# Altium PCB PCB3小.PcbDoc
Units mil, origin at the board's own origin, x right, y up, seen from the top; angles counter-clockwise.
Board outline 7278.39 x 4778.39 mil, 2 copper layers (Top Layer, Bottom Layer), stack 16 mil thick; 124 components, 58 nets, 360 pads, 620 vias.
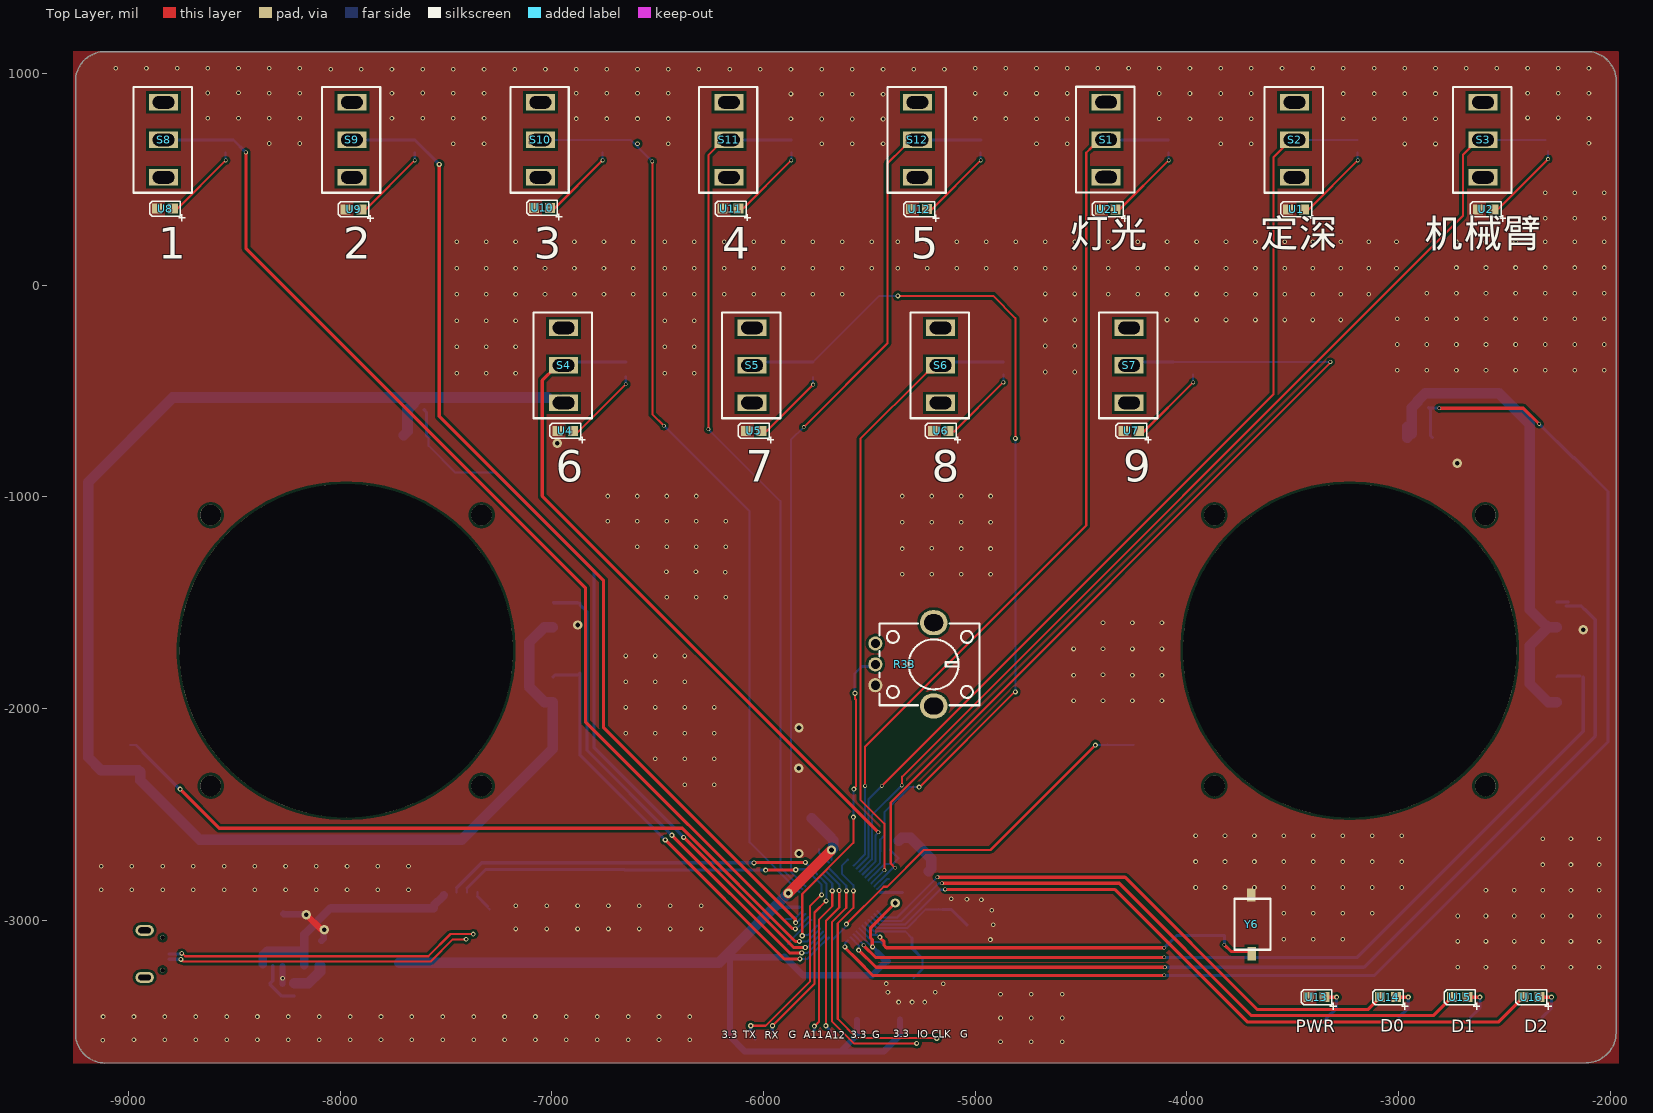
[diagram p0: Top Layer view]
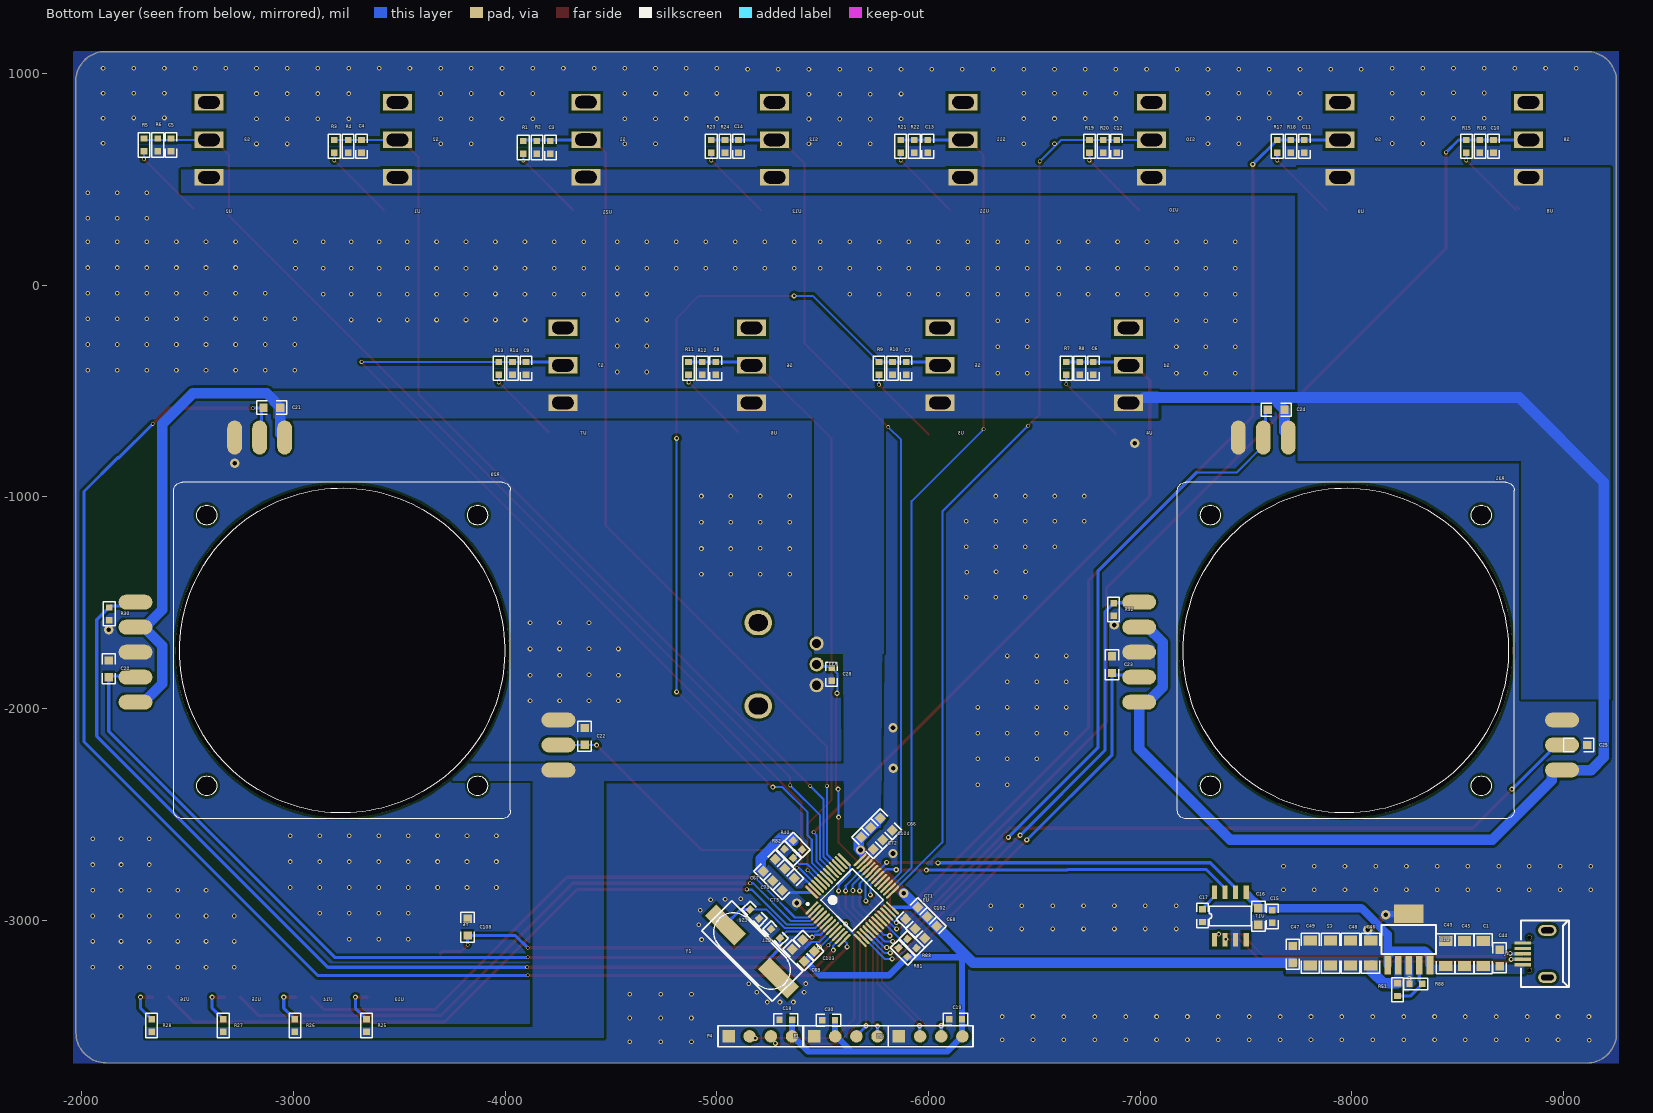
[diagram p1: Bottom Layer view, seen from below]

## Layer stack, top to bottom
Top Solder: solder mask 0.6, Solder Resist, Dk 3.5
Top Layer: signal copper 1.6
Dielectric 1: dielectric 12.8, FR-4, Dk 4.8
Bottom Layer: signal copper 1.6
Bottom Solder: solder mask 0.6, Solder Resist, Dk 3.5

## Board outline
-9250,-3535 ccw(c-9110.81,-3535) -9110.81,-3674.19 -2110.81,-3672.42 -2112.23,-3672.43 ccw(c-2112.23,-3532.13) -1971.92,-3532.13 -1971.61,967.87 -1971.61,966.17 ccw(c-2109.64,966.17) -2109.64,1104.19 -2110.81,1104.19 -9110.81,1104.19 ccw(c-9110.81,965) -9250,965

## Design rules (kind name [scope] priority, off if disabled: settings)
Clearance [All] p1: gap=6 ignorepadtopadclearanceinfootprint=TRUE except(0: Arc-Hole Track-Hole SMDPad-Hole THPad-Hole Via-Hole Fill-Hole Poly-Hole Region-Hole Text-Hole; 12: Arc-Fill Arc-Poly Arc-Region Track-Fill Track-Poly Track-Region SMDPad-Fill SMDPad-Poly SMDPad-Region THPad-Fill THPad-Poly THPad-Region Via-Fill Via-Poly Via-Region Fill-Fill Fill-Poly Fill-Region Poly-Poly Poly-Region Region-Region)
PlaneConnect [All] p1: planeconnectstyle=Direct reliefexpansion=20 reliefentries=4 reliefconductorwidth=10 reliefairgap=10
PolygonConnect [All] p1: connectstyle=Direct reliefconductorwidth=10 reliefentries=4 polygonreliefangle="90 Angle" airgapwidth=10
RoutingVias [All] p1: holewidth=28 width=50 viastyle="Through Hole" minholewidth=28 minwidth=50 maxholewidth=28 maxwidth=50
SolderMaskExpansion [All] p1: expansion=4 istentingtop=FALSE
Width pwr [InNetClass('pwr')] p1: maxlimit=60 minlimit=15 preferedwidth=15
Width [InNetClass('SIGNAL')] p2: maxlimit=15 minlimit=10 preferedwidth=15 minimp=50.000000 maximp=50.000000 favimp=50.000000
29 further rules are at their usual default settings.

## Classes and differential pairs
net class PWR: +5V VCC_3.3V
net class SIGNAL: ADC1 ADC2 ADC3 ADC4 ADC5 ADC6 ADC7 ADC8 ADC9 BOOT0 BOOT1 CH330_D+ CH330_D- LED0 LED1 LED2 NetC17_1 NetR1_1 NetR3_1 NetR5_1 NetR7_1 NetR9_1 NetR11_1 NetR13_1 NetR15_1 NetR17_1 NetR19_1 NetR21_1 NetR23_1 NetR25_2 NetR26_2 NetR27_2 NetR28_2 NetR51_2 NRST OSCIN OSCOUT PA11 PA12 PB3 PB4 PB5 PB6 PB7 PB8 PB9 PB10 PB11 PB12 PB13 PB14 SWCLK SWIO U1_RX U1_TX
net class GND: AGND

## Components (designator, comment, footprint, x,y, rotation, side; value= is the part's Value field where it differs from the comment)
C1 "CAP-CFR04R-C" 1206C -8607.56,-3153.88 r0 top value=10uf
C2 "CAP-CFR04R-C" 1206C -7885.47,-3151.12 r0 top value=10uf
C3 "CAP-CFR04R-C" 0603C -4215.53,649.66 r270 top value=104
C4 "CAP-CFR04R-C" 0603C -3323.38,654.66 r270 top value=104
C5 "CAP-CFR04R-C" 0603C -2423.64,661.35 r270 top value=104
C6 "CAP-CFR04R-C" 0603C -6780.97,-394.03 r270 top value=104
C7 "CAP-CFR04R-C" 0603C -5896.19,-394.03 r270 top value=104
C8 "CAP-CFR04R-C" 0603C -4996.77,-394.03 r270 top value=104
C9 "CAP-CFR04R-C" 0603C -4100.53,-394.03 r270 top value=104
C10 "CAP-CFR04R-C" 0603C -8671.24,654.66 r270 top value=104
C11 "CAP-CFR04R-C" 0603C -7777.86,654.66 r270 top value=104
C12 "CAP-CFR04R-C" 0603C -6890.71,654.66 r270 top value=104
C13 "CAP-CFR04R-C" 0603C -5998.6,654.66 r270 top value=104
C14 "CAP-CFR04R-C" 0603C -5104.23,654.66 r270 top value=104
C15 "CAP-CFR04R-C" 0603C -7621.2,-2979.88 r90 top value=104
C16 "CAP-CFR04R-C" 0805C -7551.2,-2974.88 r90 top value=104
C17 "CAP-CFR04R-C" 0603C -7296.2,-2979.88 r270 top value=104
C18 "CAP-CFR04R-C" 0603C -5327.58,-3467.3 r180 top value=22pf
C19 "CAP-CFR04R-C" 0603C -6130,-3465 r180 top value=22pf
C20 "CAP-CFR04R-C" 0805C -2120,-1805 r90 top value=104
C21 "CAP-CFR04R-C" 0805C -2890,-585.12 r0 top value=104
C22 "CAP-CFR04R-C" 0805C -4367.96,-2123.52 r90 top value=104
C23 "CAP-CFR04R-C" 0805C -6860,-1785 r90 top value=104
C24 "CAP-CFR04R-C" 0805C -7635,-595.12 r0 top value=104
C25 "CAP-CFR04R-C" 0805C -9080,-2165 r180 top value=104
C26 "CAP-CFR04R-C" 0603C -5175,-2969.86 r45 top value=22pf
C27 "CAP-CFR04R-C" 0603C -5280,-3063.08 r225 top value=22pf
C28 "CAP-CFR04R-C" 0603C -5544.53,-1839.98 r270 top value=104
C30 "CAP-CFR04R-C" 0603C -5530,-3469.6 r180 top value=22pf
C43 "CAP-CFR04R-C" 1206C -8429.53,-3153.88 r0 top value=10uf
C44 "CAP-CFR04R-C" 0805C -8705,-3185 r270 top value=1uf
C45 "CAP-CFR04R-C" 1206C -8518.55,-3153.88 r0 top value=10uf
C46 "CAP-CFR04R-C" 1206C -8075.47,-3151.12 r0 top value=10uf
C47 "CAP-CFR04R-C" 0805C -7727.51,-3167.6 r270 top value=1uf
C48 "CAP-CFR04R-C" 1206C -7980.47,-3151.12 r0 top value=10uf
C49 "CAP-CFR04R-C" 1206C -7790.47,-3151.12 r0 top value=10uf
C66 "CAP-CFR04R-C" 0805C -5810.47,-2546.12 r225 top value=104
C67 "CAP-CFR04R-C" 0805C -5247.29,-2729.83 r135 top value=104
C68 "CAP-CFR04R-C" 0805C -6010.47,-3066.12 r315 top value=104
C69 "CAP-CFR04R-C" 0805C -5374.65,-3165.23 r45 top value=104
C70 "CAP-CFR04R-C" 0805C -5292.29,-2774.83 r135 top value=104
C71 "CAP-CFR04R-C" 0805C -5920.47,-2976.12 r315 top value=104
C72 "CAP-CFR04R-C" 0805C -5720.47,-2636.12 r225 top value=104
C73 "CAP-CFR04R-C" 0805C -5337.29,-2819.83 r135 top value=104
C102 "CAP-CFR04R-C" 0805C -5965.47,-3021.12 r315 top value=104
C103 "CAP-CFR04R-C" 0805C -5422.59,-3118.71 r45 top value=104
C104 "CAP-CFR04R-C" 0805C -5765.47,-2591.12 r225 top value=104
C108 "CAP-CFR04R-C" 0805C -3815.47,-3025.52 r90 top value=104
J1 "MICRO_USB" MICRO_USB -8910.47,-3156.12 r0 bottom
P1 "HDR1X4" HDR1X4(2) -5600,-3555 r180 bottom
P2 "HDR1X4" HDR1X4(2) -6001,-3555 r180 bottom
P4 "HDR1X4" HDR1X4(2) -5196,-3555 r180 bottom
R1 "RES-WR1" 0603R -4095.53,648.77 r270 top value=2K
R2 "RES-WR1" 0603R -4160.27,648.77 r270 top value=20K
R3 "RES-WR1" 0603R -3203.1,653.77 r270 top value=2K
R4 "RES-WR1" 0603R -3268.25,653.77 r270 top value=20K
R5 "RES-WR1" 0603R -2303.64,660.46 r270 top value=2K
R6 "RES-WR1" 0603R -2368.64,660.46 r270 top value=20K
R7 "RES-WR1" 0603R -6660.97,-394.92 r270 top value=2K
R8 "RES-WR1" 0603R -6725.07,-394.92 r270 top value=20K
R9 "RES-WR1" 0603R -5776.19,-394.92 r270 top value=2K
R10 "RES-WR1" 0603R -5840.5,-394.92 r270 top value=20K
R11 "RES-WR1" 0603R -4876.77,-394.92 r270 top value=2K
R12 "RES-WR1" 0603R -4941.3,-394.92 r270 top value=20K
R13 "RES-WR1" 0603R -3980.53,-394.92 r270 top value=2K
R14 "RES-WR1" 0603R -4045.27,-394.92 r270 top value=20K
R15 "RES-WR1" 0603R -8551.24,653.77 r270 top value=2K
R16 "RES-WR1" 0603R -8615.34,653.77 r270 top value=20K
R17 "RES-WR1" 0603R -7657.86,653.77 r270 top value=2K
R18 "RES-WR1" 0603R -7722.09,653.77 r270 top value=20K
R19 "RES-WR1" 0603R -6770.71,653.77 r270 top value=2K
R20 "RES-WR1" 0603R -6835.5,653.77 r270 top value=20K
R21 "RES-WR1" 0603R -5878.6,653.77 r270 top value=2K
R22 "RES-WR1" 0603R -5943.08,653.77 r270 top value=20K
R23 "RES-WR1" 0603R -4984.23,653.77 r270 top value=2K
R24 "RES-WR1" 0603R -5048.85,653.77 r270 top value=20K
R25 "RES-WR1" 0603R -3355,-3500 r270 top value=510R
R26 "RES-WR1" 0603R -3016.67,-3500 r270 top value=510R
R27 "RES-WR1" 0603R -2678.33,-3500 r270 top value=510R
R28 "RES-WR1" 0603R -2340,-3500 r270 top value=510R
R29 "ROCKER" ROCKER#1 -3230,-1726.6 r0 top
R30 "RES-WR1" 0603R -2140,-1555 r270 top value=2K
R31 "ROCKER" ROCKER#2 -7971.75,-1726.6 r0 top
R32 "RES-WR1" 0603R -6885,-1535 r270 top value=2K
R33 "RK09K" RK09K_RES -5209.53,-1798.84 r270 top
R40 "RES-WR1" 0603R -5391.29,-2639.83 r225 top value=???
R51 "RES-WR1" 0603R -8205,-3325 r90 top value=52.3K
R81 "RES-WR1" 0603R -5870,-3156.34 r45 top value=???
R82 "RES-WR1" 0603R -5329.98,-2690.68 r45 top value=???
R83 "RES-WR1" 0603R -5930.47,-3104.09 r225 top value=???
R88 "RES-WR1" 0603R -8305,-3290 r180 top value=510R
S1 "TOGGLE_SW" TOGGLE_SWITCH -4358.96,683.38 r0 top
S2 "TOGGLE_SW" TOGGLE_SWITCH -3468.96,682.84 r0 top
S3 "TOGGLE_SW" TOGGLE_SWITCH -2578.3,682.84 r0 top
S4 "TOGGLE_SW" TOGGLE_SWITCH -6922.23,-382.82 r0 top
S5 "TOGGLE_SW" TOGGLE_SWITCH -6031.58,-382.82 r0 top
S6 "TOGGLE_SW" TOGGLE_SWITCH -5140.92,-382.82 r0 top
S7 "TOGGLE_SW" TOGGLE_SWITCH -4250.27,-382.82 r0 top
S8 "TOGGLE_SW" TOGGLE_SWITCH -8812.23,682.84 r0 top
S9 "TOGGLE_SW" TOGGLE_SWITCH -7922.23,682.84 r0 top
S10 "TOGGLE_SW" TOGGLE_SWITCH -7031.58,682.84 r0 top
S11 "TOGGLE_SW" TOGGLE_SWITCH -6140.92,682.84 r0 top
S12 "TOGGLE_SW" TOGGLE_SWITCH -5250.27,682.84 r0 top
U1 "DS0" 0805D -3491.07,361.82 r0 top
U2 "DS0" 0805D -2595.2,361.82 r0 top
U3 "STM32F103C" LQFP-48_M -5630.47,-2921.12 r135 top
U4 "DS0" 0805D -6944.35,-684.4 r0 top
U5 "DS0" 0805D -6053.69,-684.4 r0 top
U6 "DS0" 0805D -5170.31,-684.4 r0 top
U7 "DS0" 0805D -4270,-684.4 r0 top
U8 "DS0" 0805D -8835,365 r0 top
U9 "DS0" 0805D -7944.35,361.87 r0 top
U10 "DS0" 0805D -7053.69,368.93 r0 top
U11 "DS0" 0805D -6163.04,365.8 r0 top
U12 "DS0" 0805D -5272.38,362.66 r0 top
U13 "DS0" 0805D -3395.2,-3360 r0 top
U14 "DS0" 0805D -3056.8,-3360 r0 top
U15 "DS0" 0805D -2718.4,-3360 r0 top
U16 "DS0" 0805D -2380,-3360 r0 top
U17 "CH340" SOP_8 -7425.47,-2979.88 r90 top
U18 "TPS737" SOT-223-6_L6.5-W3.5-P1.27-BL -8260.47,-3121.12 r270 top
U21 "DS0" 0805D -4381.07,361.82 r0 top
Y1 "XTAL" XTAL3 -5165.14,-3146.6 r225 bottom
Y6 "KEY" KEY_3_6_2.5 -3705.47,-2990.52 r0 top

## Footprints (in the part's own frame and the unit in brackets; to place one, negate y for a bottom-side part, rotate by r counter-clockwise, add the part's x,y. Pads: shape width x height; smd on the part's side, far side on the other; paste and mask are expansions set on the pad)
0603C [mil]
  rect 29.92x31.5 smd far side: 1(-32.03,2.3) 2(27.81,2.3)
0603R [mil]
  rect 29.92x31.5 smd far side: 1(26.92,10.5) 2(-32.92,10.5)
0805C [mm]
  rect 1x1 smd far side: 1(-1.181,0.179) 2(0.819,0.179)
0805D [mil]
  rect 47.24x47.24 smd: 1(45.2,-3.13) 2(-29.6,-3.13)
  silkscreen extent -65,-62 103,32
1206C [mm]
  rect 1.6x1.2 smd far side: 1(-0.335,1.402) 2(-0.335,-1.598)
HDR1X4(2) [mil]
  rect 59.06x59.06 smd: 1(-141,7)
  round 59.06 smd: 2(-41,7) 3(59,7) 4(159,7)
  silkscreen extent -191,-43 209,57
KEY_3_6_2.5 [mm]
  rect 1x1.6 smd: 1(0.302,-4.272) 2(0.27,2.806)
  silkscreen extent -1.76,-3.77 2.56,2.34
LQFP-48_M [mil]
  oval 82.68x11.81 smd far side: 1(-143.52,-113.96) 2(-143.52,-94.27) 3(-143.52,-74.59) 4(-143.52,-54.9) 5(-143.52,-35.22) 6(-143.52,-15.53) 7(-143.52,4.15) 8(-143.52,23.84) 9(-143.52,43.52) 10(-143.52,63.21) 11(-143.52,82.89) 12(-143.52,102.58) 25(179.32,102.58) 26(179.32,82.89) 27(179.32,63.21) 28(179.32,43.52) 29(179.32,23.84) 30(179.32,4.15) 31(179.32,-15.53) 32(179.32,-35.22) 33(179.32,-54.9) 34(179.32,-74.59) 35(179.32,-94.27) 36(179.32,-113.96)
  oval 11.81x82.68 smd far side: 13(-90.37,155.73) 14(-70.68,155.73) 15(-51,155.73) 16(-31.31,155.73) 17(-11.63,155.73) 18(8.06,155.73) 19(27.74,155.73) 20(47.43,155.73) 21(67.11,155.73) 22(86.8,155.73) 23(106.48,155.73) 24(126.17,155.73) 37(126.17,-167.11) 38(106.48,-167.11) 39(86.8,-167.11) 40(67.11,-167.11) 41(47.43,-167.11) 42(27.74,-167.11) 43(8.06,-167.11) 44(-11.63,-167.11) 45(-31.31,-167.11) 46(-51,-167.11) 47(-70.68,-167.11) 48(-90.37,-167.11)
MICRO_USB [mm]
  rect 2x0.4 smd: 1(2.618,1.362) 2(2.618,0.711) 3(2.618,0.061) 4(2.618,-0.588) 5(2.618,-1.237)
  oval 2.199x1.3 hole 0.7 slot 1.5 at 0 deg: 6(-0.332,-2.762) 7(-0.332,2.888)
  round 0.55 hole 0.55 unplated: $$$1(1.818,-1.886) $$$2(1.818,2.013)
  silkscreen extent -2.94,-3.96 2.81,4.04
RK09K_RES [mm]
  round 1.7 hole 1.1: 1(-2.703,-6.649) 2(-0.203,-6.649) 3(2.297,-6.649)
  oval 3x3.3 hole 2 slot 2.3 at 90 deg: 4(4.797,0.351) 5(-5.203,0.351)
  silkscreen extent -5.1,-6.15 4.7,5.85
ROCKER#1 [mil]
  oval 160x70 smd far side: 1(976.75,-242.74) 2(976.75,-124.62) 3(976.75,-6.51) 4(976.75,111.6) 5(976.75,229.71) 9(-1021.28,-563.6) 10(-1021.28,-445.49) 11(-1021.28,-327.38)
  oval 70x160 smd far side: 6(508.25,1007.26) 7(390.14,1007.26) 8(272.03,1007.26)
  round 98.43 hole 98.43: ""(-639.39,-638.41) ""(-639.39,641.12) ""(640.14,-638.41) ""(640.14,641.12)
  round 1574.8 hole 1574.8: ""(0,0)
ROCKER#2 [mil]
  oval 160x70 smd far side: 1(976.75,-242.74) 2(976.75,-124.62) 3(976.75,-6.51) 4(976.75,111.6) 5(976.75,229.71) 9(-1021.28,-563.6) 10(-1021.28,-445.49) 11(-1021.28,-327.38)
  oval 70x160 smd far side: 6(508.25,1007.26) 7(390.14,1007.26) 8(272.03,1007.26)
  round 98.43 hole 98.43: " "(-639.39,-638.41) " "(-639.39,641.12) " "(640.14,-638.41) " "(640.14,641.12)
  round 1574.8 hole 1574.8: " "(0,0)
SOP_8 [mil]
  rect 65x25 smd far side: 1(-112.2,-75) 2(-112.2,-25) 3(-112.2,25) 4(-112.2,75) 5(112.21,75) 6(112.21,25) 7(112.21,-25) 8(112.21,-75)
SOT-223-6_L6.5-W3.5-P1.27-BL [mil]
  rect 86.61x31.5 smd far side: 1(91.92,91.81) 2(91.92,41.81) 3(91.92,-8.19) 4(91.92,-58.19) 5(91.92,-108.19)
  rect 86.61x137.8 smd far side: 6(-152.08,-8.19)
TOGGLE_SWITCH [mm]
  rect 3.5x2 hole 1.5 slot 2.6 at 0 deg: 1(-0.562,4.614) 2(-0.562,0.114) 3(-0.562,-4.386)
  silkscreen extent -4.16,-6.24 2.84,6.46
XTAL3 [mm]
  rect 5x2 smd: 12(-4.5,0) 12(4.5,0)
  silkscreen extent -6,-2.5 6,2.6

## Part data
C1 C2 C3 C4 C5 C6 C7 C8 C9 C10 C11 C12 C13 C14 C15 C16 C17 C18 C19 C20 C21 C22 C23 C24 C25 C26 C27 C28 C30 C43 C44 C45 C46 C47 C48 C49 C66 C67 C68 C69 C70 C71 C72 C73 C102 C103 C104 C108: "RADIAL FILM CAPACITOR, MIL-SPEC SIZE CFR04R SIZE 'C'", Manufacturer #1=KEMET, Part Number=TBD, Tolerance=???, Sim.Analog.Order=Model$, Sim.Analog.Prefix=C, Voltage Rating=???
  C1 C2 C43 C45 C46 C48 C49: PCB DECAL=1206C
  C3 C4 C5 C6 C7 C8 C9 C10 C11 C12 C13 C14 C15 C17 C18 C19 C26 C27 C28 C30: PCB DECAL=0603C
  C16 C20 C21 C22 C23 C24 C25 C44 C47 C66 C67 C68 C69 C70 C71 C72 C73 C102 C103 C104 C108: PCB DECAL=0805C
R1 R2 R3 R4 R5 R6 R7 R8 R9 R10 R11 R12 R13 R14 R15 R16 R17 R18 R19 R20 R21 R22 R23 R24 R25 R26 R27 R28 R30 R32 R40 R51 R81 R82 R83 R88: "WIRE WOUND RESISTOR 3.4 X 7.05 MM", Manufacturer #1="IPC SM-782 STD.", PCB DECAL=0603R, Sim.Analog.Order=Model$, Sim.Analog.Prefix=R
U1 U2 U4 U5 U6 U7 U8 U9 U10 U11 U12 U13 U14 U15 U16 U21: library part LED, Comment_1=LED, PCB DECAL=0805D
U3: "STM32单片机48引脚", Comment_1=STM32F103C, PCB DECAL=LQFP-48_M
U17: library part CH330, PCB DECAL=SOP-8
J1: PCB DECAL=MICRO-USB-SMD_5PBOARD5.9
P1 P2 P4: PCB DECAL=HDR1X4
R29 R31: PCB DECAL=ROCKER
R33: PCB DECAL=RK09K_RES
S1 S2 S3 S4 S5 S6 S7 S8 S9 S10 S11 S12: PCB DECAL=TOGGLE_SWITCH
U18: PCB DECAL=SOT-223-6_L6.5-W3.5-P1.27-BL
Y1: PCB DECAL=XTAL
Y6: PCB DECAL=KEY_3_6_2.5

## Via types
v1: diameter 22, hole 12, Top Layer to Bottom Layer, tented both sides, 528 vias
v2: diameter 24, hole 12, Top Layer to Bottom Layer, tented both sides, 45 vias
v3: diameter 17.72, hole 11.81, Top Layer to Bottom Layer, 35 vias
v4: diameter 44, hole 22, Top Layer to Bottom Layer, tented both sides, 12 vias

## Nets (pads, with @x,y where several pads share a name; then routed paths per layer and width w, separated by ;. In a path a pad name is that pad's centre, name@x,y a point inside that pad or via, vN(x,y) a via of type N, cw(c..) or ccw(c..) an arc to the next point about the centre after c; other vN are vias at no path point)
+5V: C1.2 C15.2 C16.2 C43.2 C44.2 C45.2 J1.1 U17.5 U18.1 U18.5 | length 1148
  Bottom Layer w40: U18.5@-8364.41,-3208.79 -8364.41,-3162.97 -8345.18,-3143.74 -8192.14,-3143.74 -8168.66,-3167.22 ; U18.1 -8168.66,-3167.22 ; U17.5@-7510,-2882.2 -7558.24,-2930.45 C16.2 -8044.93,-2942.62 -8168.66,-3066.35 -8168.66,-3167.22
ADC1: C20.1 R29.2 U3.10 | length 4305.5
  Top Layer w15: v3@-5525.94,-3119.73 -5470.67,-3175 v3(-4105.98,-3175)
  Bottom Layer w10: U3.10 -5528.62,-3112.37 -5528.62,-3117.05 v3@-5525.94,-3119.73 ; R29.2 R29.2@-2248.19,-1846.17
  Bottom Layer w15: v3(-4105.98,-3175) -3195,-3175 -2127.04,-2107.04 C20.1 ; R29.2@-2248.19,-1846.17 C20.1@-2141.72,-1846.17
  other v3: -5527.28,-3118.39
ADC2: R29.5 R30.2 U3.11 | length 4812.1
  Top Layer w15: v2@-5548.94,-3141.48 -5468.41,-3222.01 v3(-4102.99,-3222.01)
  Bottom Layer w10: U3.11 -5548.94,-3119.88 v2@-5548.94,-3141.48
  Bottom Layer w15: v3(-4102.99,-3222.01) -3162.01,-3222.01 -2070,-2130 -2070,-1580.06 -2120.52,-1529.54 -2122.04,-1529.54 R30.2 -2136.58,-1515 R29.5@-2208.25,-1515 ; R29.5 R29.5@-2197.15,-1496.89
  other v2: -5550.29,-3140.51
ADC3: C21.2 R29.7 U3.12 | length 6494
  Top Layer w15: v2@-5614.53,-3130.25 -5555.31,-3189.47 -5484.78,-3260 v3(-4105.98,-3260) ; v3(-2807.48,-580.46) -2409.54,-580.46 v3(-2335,-655)
  Bottom Layer w10: v2(-5615.05,-3125.73) -5615.05,-3108.67 U3.12
  Bottom Layer w15: v3(-4105.98,-3260) -3113.21,-3260 -2010,-2156.79 -2010,-974.33 -2169.41,-814.93 -2175.07,-814.93 v3(-2335,-655) ; C21.2 C21.2@-2856.34,-579.48 ; R29.7 -2848.8,-710.39 -2848.8,-587.02 C21.2@-2856.34,-579.48 ; v3(-2807.48,-580.46) -2808.22,-580.46 -2809.73,-578.94 -2856.88,-578.94 C21.2@-2856.34,-579.48
ADC4: C22.1 R29.10 U3.13 | length 1815.3
  Top Layer w10: v2(-5608.57,-3017.65) -5432.49,-2841.57 -5415.86,-2841.57 -5242.46,-2668.17 -4927.55,-2668.17 v2(-4431.47,-2172.09)
  Bottom Layer w10: U3.13 -5611.25,-3029.7 -5611.25,-3020.33 v2(-5608.57,-3017.65) ; v2(-4431.47,-2172.09) C22.1@-4373.83,-2172.09 ; C22.1 -4373.83,-2171.17 -4252.2,-2171.17 R29.10
ADC5: C23.1 R31.2 U3.14 | length 2140.7
  Top Layer w15: v2(-6463.79,-2620) -5901.12,-3182.67 v2(-5827.85,-3182.67)
  Bottom Layer w10: v2@-6471.59,-2613.41 -6470.38,-2613.41 v2(-6463.79,-2620) ; v2(-5827.85,-3182.67) -5793.49,-3182.67 -5717.44,-3106.62 -5716.02,-3106.62 U3.14
  Bottom Layer w15: R31.2 -6985.13,-1841.35 -6876.91,-1841.35 C23.1 -6867.04,-2217.96 v2@-6471.59,-2613.41
ADC6: R31.5 R32.2 U3.15 | length 2393
  Top Layer w15: v2(-6432.92,-2598.04) -5876.96,-3154 v2(-5819,-3154)
  Bottom Layer w10: R31.5 R31.5@-6992.4,-1499.48 ; R32.2@-6877.1,-1499.48 R32.2 ; v2(-5819,-3154) -5791.23,-3154 U3.15
  Bottom Layer w15: R31.5@-6992.4,-1499.48 R32.2@-6877.1,-1499.48 ; R32.2@-6867.04,-1502.08 -6867.04,-1508.75 -6833.85,-1541.94 -6833.85,-2197.11 v2(-6432.92,-2598.04)
ADC7: C24.2 R31.7 U3.16 | length 3544.3
  Top Layer w15: v2(-6377.15,-2607.94) -6120.43,-2864.66 -5856.59,-3128.5 v2(-5802.58,-3128.5)
  Bottom Layer w10: R31.7 -7581.62,-758.38 -7455,-885 -7265,-885 ; v2(-5802.58,-3128.5) -5793.58,-3128.5 U3.16
  Bottom Layer w15: C24.2 -7592.14,-598.68 -7592.14,-708.81 R31.7 ; -7265,-885 -6800,-1350 -6800,-2185.09 v2(-6377.15,-2607.94)
ADC8: C25.1 R31.10 U3.17 | length 3671
  Top Layer w15: v2(-8756.05,-2380) -8571.05,-2565 -6384.03,-2565 -5849.03,-3100 v2(-5829.81,-3100)
  Bottom Layer w10: R31.10 -8964.27,-2172.09 -8931.55,-2204.81 -8931.55,-2206.32 ; v2@-8757.87,-2380 v2(-8756.05,-2380) ; v2(-5829.81,-3100) -5792.91,-3100 U3.17
  Bottom Layer w15: -8931.55,-2206.32 v2@-8757.87,-2380
ADC9: C28.1 R33.2 U3.18 | length 1552.7
  Top Layer w10: v2(-5816.74,-3072.84) -5816.74,-2875.71 -5575.02,-2633.99 v2(-5575.02,-2512.64) ; v2(-5573,-2380) -5573,-2376.21 -5562.26,-2365.47 -5562.26,-1959.38 -5567.26,-1954.38 -5567.26,-1927.55 v2(-5567.42,-1927.38)
  Bottom Layer w10: v2(-5816.74,-3072.84) -5814.07,-3070.16 -5790.92,-3070.16 U3.18 ; v2(-5575.02,-2512.64) -5574.01,-2511.63 -5574.01,-2381.01 v2(-5573,-2380) ; v2(-5567.42,-1927.38) -5568.98,-1925.83 -5568.98,-1833.91 -5543.02,-1807.95 C28.1
  Bottom Layer w15: C28.1 -5534.77,-1800.49 -5480.96,-1800.49 R33.2
AGND: C1.1 C2.1 C3.2 C4.2 C5.2 C6.2 C7.2 C8.2 C9.2 C10.2 C11.2 C12.2 C13.2 C14.2 C15.1 C16.1 C17.2 C18.1 C19.1 C20.2 C22.2 C23.2 C25.2 C26.1 C27.1 C28.2 C30.1 C43.1 C44.1 C45.1 C46.1 C47.1 C48.1 C49.1 C66.2 C67.2 C68.2 C69.2 C70.2 C71.2 C72.2 C73.2 C102.2 C103.2 C104.2 C108.2 J1.5 P1.1 P2.1 P4.1 R2.1 R4.1 R6.1 R8.1 R10.1 R12.1 R14.1 R16.1 R18.1 R20.1 R22.1 R24.1 R29.3 R29.6 R29.11 R30.1 R31.3 R31.6 R31.11 R32.1 R33.3 R82.1 R83.1 R88.2 U1.2 U2.2 U3.8 U3.23 U3.35 U3.47 U4.2 U5.2 U6.2 U7.2 U8.2 U9.2 U10.2 U11.2 U12.2 U13.2 U17.3 U18.3 U18.6 U21.2 Y6.2 | length 789.4
  Top Layer w30: v4(-8159.29,-2973.51) -8090.51,-3042.28 -8077.65,-3042.28 v4(-8074.97,-3044.96)
  Bottom Layer w10: U18.3@-8272.08,-3216.46 U18.3 ; C71.2 -5871.92,-2993.96 -5865.54,-2987.58 -5847.7,-2987.58 -5816.08,-2955.95 U3.23 ; C72.2 -5738.31,-2679.97 U3.35 ; U3.8 -5482.92,-3102.39 -5445.33,-3102.39 -5417.72,-3130 ; U3.47 -5414.54,-2805.14 -5406.49,-2805.14
  Bottom Layer w30: R88.2 v1(-8272.08,-3272.94) U18.3@-8272.08,-3216.46 ; U18.6 -8266.43,-2971.28 -8161.52,-2971.28 v4(-8159.29,-2973.51) ; C46.1 -8086.27,-3095.92 -8077.65,-3087.3 -8077.65,-3047.64 v4(-8074.97,-3044.96)
  other v1: -4880,-3573.07 -4734.09,-3573.07 -4588.17,-3573.07 -9120.7,-3566.2 -8974.06,-3565 -8828.14,-3565 -8682.23,-3565 -8536.31,-3565 -8390.4,-3565 -8244.49,-3565 -8098.57,-3565 -7952.66,-3565 -7806.75,-3565 -7660.83,-3565 -7514.92,-3565 -7369,-3565 -7223.09,-3565 -7077.18,-3565 -6931.26,-3565 -6785.35,-3565 -6639.43,-3565 -6493.52,-3565 -6347.61,-3565 -4879.97,-3461.54 -4734.06,-3461.54 -4588.14,-3461.54 -9120,-3454.61 -8974.09,-3454.61 -8828.17,-3454.61 -8682.26,-3454.61 -8536.34,-3454.61 -8390.43,-3454.61 -8244.52,-3454.61 -8098.6,-3454.61 -7952.69,-3454.61 -7806.77,-3454.61 -7660.86,-3454.61 -7514.95,-3454.61 -7369.03,-3454.61 -7223.12,-3454.61 -7077.21,-3454.61 -6931.29,-3454.61 -6785.38,-3454.61 -6639.46,-3454.61 -6493.55,-3454.61 -6347.64,-3454.61 -5361.67,-3386.28 -5298.04,-3386.28 -5238.25,-3386.28 -4880,-3350 -4734.09,-3350 -4588.17,-3350 -5411.69,-3340 -5188.23,-3340 -5419.12,-3298.88 -5151.12,-3299.55 -2720.47,-3221.56 -2586.61,-3221.56 -2452.74,-3221.56 -2318.87,-3221.56 -2185,-3221.56 -2051.14,-3221.56 -2720.47,-3100 -2586.61,-3100 -2452.74,-3100 -2318.87,-3100 -2185,-3100 -2051.14,-3100 -4927.55,-3090.9 -3541.4,-3089.92 -3402.36,-3089.92 -3263.31,-3089.92 -7169.97,-3040.84 -7024.06,-3040.84 -6878.14,-3040.84 -6732.23,-3040.84 -6586.31,-3040.84 -6440.4,-3040.84 -6294.49,-3040.84 -4914.21,-3021.33 -2720.47,-2979.68 -2586.61,-2979.68 -2452.74,-2979.68 -2318.87,-2979.68 -2185,-2979.68 -2051.14,-2979.68 -3541.4,-2967.44 -3402.36,-2967.44 -3263.31,-2967.44 -3124.27,-2967.44 -4920.92,-2951.74 -7170,-2930.45 -7024.09,-2930.45 -6878.17,-2930.45 -6732.26,-2930.45 -6586.34,-2930.45 -6440.43,-2930.45 -6294.52,-2930.45 -4970,-2903.58 -5038.52,-2899.93 -5113.47,-2897.48 -2586.61,-2858.12 -2452.74,-2858.12 -2318.87,-2858.12 -2185,-2858.12 -2051.14,-2858.12 -9128.76,-2855.39 -8983.57,-2855.39 -8838.39,-2855.39 -8693.21,-2855.39 -8548.02,-2855.39 -8402.84,-2855.39 -8257.65,-2855.39 -8112.47,-2855.39 -7967.28,-2855.39 -7822.1,-2855.39 -7676.91,-2855.39 -3958.54,-2844.96 -3819.49,-2844.96 -3680.45,-2844.96 -3541.4,-2844.96 -3402.36,-2844.96 -3263.31,-2844.96 -3124.27,-2844.96 -2985.22,-2844.96 -9128.76,-2745 -8983.57,-2745 -8838.39,-2745 -8693.21,-2745 -8548.02,-2745 -8402.84,-2745 -8257.65,-2745 -8112.47,-2745 -7967.28,-2745 -7822.1,-2745 -7676.91,-2745 -2318.87,-2736.56 -2185,-2736.56 -2051.14,-2736.56 -3958.54,-2722.48 -3819.49,-2722.48 -3680.45,-2722.48 -3541.4,-2722.48 -3402.36,-2722.48 -3263.31,-2722.48 -3124.27,-2722.48 -2985.22,-2722.48 -2318.87,-2615 -2185,-2615 -2051.14,-2615 -3958.54,-2600 -3819.49,-2600 -3680.45,-2600 -3541.4,-2600 -3402.36,-2600 -3263.31,-2600 -3124.27,-2600 -2985.22,-2600 -6371.64,-2358.97 -6232.45,-2358.97 -6510.82,-2237.41 -6371.64,-2237.41 -6232.45,-2237.41 -6650,-2115.85 -6510.82,-2115.85 -6371.64,-2115.85 -6232.45,-2115.85 -6650,-1994.29 -6510.82,-1994.29 -6371.64,-1994.29 -6232.45,-1994.29 -4535,-1962.77 -4395.82,-1962.77 -4256.64,-1962.77 -4117.45,-1962.77 -6650,-1872.73 -6510.82,-1872.73 -6371.64,-1872.73 -4535,-1841.99 -4256.64,-1841.99 -4117.45,-1841.99 -4395.82,-1839.85 -6650,-1751.17 -6510.82,-1751.17 -6371.64,-1751.17 -4535,-1717.99 -4256.64,-1717.99 -4117.45,-1717.99 -4395.82,-1716.92 -4395.82,-1593.99 -4256.64,-1593.99 -4117.45,-1593.99 -6456.75,-1473.19 -6317.57,-1473.19 -6178.39,-1473.19 -5344.65,-1364.48 -5205.47,-1364.48 -5066.29,-1364.48 -4927.11,-1364.48 -6179.82,-1355.36 -6458.18,-1353.82 -6319,-1353.82 -5344.65,-1243.7 -5066.29,-1243.7 -4927.11,-1243.7 -5205.47,-1241.55 -6595.94,-1234.44 -6456.75,-1234.44 -6317.57,-1234.44 -6178.39,-1234.44 -5344.65,-1119.7 -5066.29,-1119.7 -4927.11,-1119.7 -5205.47,-1118.63 -6735.12,-1115.07 -6595.94,-1115.07 -6456.75,-1115.07 -6317.57,-1115.07 -6178.39,-1115.07 -6735.12,-995.7 -6595.94,-995.7 -6456.75,-995.7 -6317.57,-995.7 -5344.65,-995.7 -5205.47,-995.7 -5066.29,-995.7 -4927.11,-995.7 -7449.53,-415 -7310.34,-415 -7171.16,-415 -6465.85,-415 -6326.67,-415 -4669.09,-409.64 -4529.91,-409.64 -3005.38,-400.78 -2865.73,-400.78 -2726.09,-400.78 -2586.44,-400.78 -2446.8,-400.78 -2307.15,-400.78 -2167.51,-400.78 -2027.86,-400.78 -7449.53,-291 -7310.34,-291 -7171.16,-291 -6465.85,-291 -6326.67,-291 -4669.09,-286.71 -4529.91,-286.71 -3005.38,-279.63 -2865.73,-279.63 -2726.09,-279.63 -2586.44,-279.63 -2446.8,-279.63 -2307.15,-279.63 -2167.51,-279.63 -2027.86,-279.63 -7449.53,-167 -7310.34,-167 -7171.16,-167 -6465.85,-167 -6326.67,-167 -4669.09,-163.78 -4529.91,-163.78 -4093.13,-163.78 -3953.95,-163.78 -3814.77,-163.78 -3675.59,-163.78 -3536.41,-163.78 -3404.63,-163.78 -3272.86,-163.78 -3005.38,-158.47 -2865.73,-158.47 -2726.09,-158.47 -2586.44,-158.47 -2446.8,-158.47 -2307.15,-158.47 -2167.51,-158.47 -2027.86,-158.47 -7449.53,-43 -7310.34,-43 -7171.16,-43 -7031.98,-43 -6892.8,-43 -6753.62,-43 -6614.43,-43 -6465.85,-43 -6326.67,-43 -6184.95,-43 -6045.77,-43 -5906.58,-43 -5767.4,-43 -5628.22,-43 -4371.5,-43 -4232.32,-43 -4093.13,-43 -3814.77,-43 -3675.59,-43 -3536.41,-43 -3404.63,-43 -3272.86,-43 -3141.08,-43 -4669.09,-40.86 -4529.91,-40.85 -3953.95,-40.85 -2865.73,-37.31 -2726.09,-37.31 -2586.44,-37.31 -2446.8,-37.31 -2307.15,-37.31 -2167.51,-37.31 -2027.86,-37.31 -7449.53,81 -7310.34,81 -7171.16,81 -7031.98,81 -6892.8,81 -6753.62,81 -6614.43,81 -6465.85,81 -6326.67,81 -6184.95,81 -6045.77,81 -5906.58,81 -5767.4,81 -5628.22,81 -5489.04,81 -5365,81 -5225.82,81 -5086.64,81 -4947.45,81 -4808.27,81 -4669.09,81 -4371.5,81 -4232.32,81 -4093.13,81 -3814.77,81 -3675.59,81 -3536.41,81 -3404.63,81 -3272.86,81 -3141.08,81 -3009.31,81 -4529.91,82.07 -3953.95,82.07 -2726.09,83.84 -2586.44,83.84 -2446.8,83.84 -2307.15,83.84 -2167.51,83.84 -2027.86,83.84 -7449.53,205 -7310.34,205 -7171.16,205 -7031.98,205 -6892.8,205 -6753.62,205 -6614.43,205 -6465.85,205 -6326.67,205 -6184.95,205 -6045.77,205 -5906.58,205 -5767.4,205 -5628.22,205 -5489.04,205 -5365,205 -5225.82,205 -5086.64,205 -4947.45,205 -4808.27,205 -4669.09,205 -4529.91,205 -4371.5,205 -4232.32,205 -4093.13,205 -3953.95,205 -3814.77,205 -3675.59,205 -3536.41,205 -3404.63,205 -3272.86,205 -3141.08,205 -3009.31,205 -2726.09,205 -2586.44,205 -2446.8,205 -2307.15,205 -2167.51,205 -2027.86,205 -2307.15,316.19 -2167.51,316.19 -2027.86,316.19 -2307.15,437.34 -2167.51,437.34 -2027.86,437.34 -2970,667.88 -2825,667.88 -6450,668.95 -5725,668.41 -5580,668.41 -5435,668.41 -4710,668.95 -4565,668.95 -3840,668.41 -3695,668.41 -8335,670.02 -8190,670.02 -7465,669.49 -7320,669.49 -2100,671.58 -5725,785.75 -5580,785.75 -5435,785.75 -5870,787.35 -4130,787.35 -3985,787.35 -3840,787.28 -3695,787.28 -3260,786.82 -3115,786.82 -2970,786.92 -2825,786.92 -6885,787.89 -6740,787.89 -6595,787.89 -6450,787.89 -5000,787.89 -4855,787.89 -4710,787.63 -4565,787.63 -8625,788.96 -8480,788.96 -8335,788.96 -8190,788.96 -7755,788.43 -7610,788.43 -7465,788.43 -7320,788.43 -2100,789.39 -2390,790.52 -2245,790.52 -5725,903.09 -5580,903.09 -5435,903.09 -5870,903.89 -4710,906.32 -4565,906.32 -4130,906.18 -3985,906.18 -3840,906.14 -3695,906.14 -3260,905.91 -3115,905.91 -2970,905.96 -2825,905.96 -7465,907.37 -7320,907.37 -6885,907.37 -6595,906.83 -6450,906.83 -5000,906.44 -4855,906.44 -2100,907.19 -8335,907.9 -8190,907.9 -7755,907.9 -6740,907.9 -2390,907.76 -2245,907.76 -8625,908.44 -8480,908.98 -7610,908.44 -8045,1020.42 -7900,1020.42 -7755,1020.42 -7610,1020.42 -7465,1020.42 -7320,1020.42 -7175,1020.42 -7030,1020.42 -6885,1020.42 -6740,1020.42 -6595,1020.42 -6450,1020.42 -6305,1020.42 -6160,1020.42 -6015,1020.42 -5870,1020.42 -5725,1020.42 -5580,1020.42 -5435,1020.42 -5290,1020.42 -5145,1020.42 -9060,1025 -8915,1025 -8770,1025 -8625,1025 -8480,1025 -8335,1025 -8190,1025 -5000,1025 -4855,1025 -4710,1025 -4565,1025 -4420,1025 -4275,1025 -4130,1025 -3985,1025 -3840,1025 -3695,1025 -3550,1025 -3405,1025 -3260,1025 -3115,1025 -2970,1025 -2825,1025 -2680,1025 -2535,1025 -2390,1025 -2245,1025 -2100,1025
  other v4: -5832.15,-2684.18 -5833.15,-2281.53 -5832.15,-2090 -2127.04,-1627.27 -6876.91,-1605 -2722.59,-840 -6973.95,-746.2
BOOT0: R40.1 R82.2 U3.44 | length 243.1
  Bottom Layer w10: U3.44 -5457.58,-2764.68 -5457.58,-2763.93 -5428.42,-2734.77 -5389.9,-2734.77 -5361.67,-2706.54 R40.1@-5401.92,-2666.29
BOOT1: R81.1 R83.2 U3.20 | length 218.5
  Bottom Layer w10: R83.2 -5899.77,-3088.37 -5882.28,-3105.85 -5880.35,-3107.79 -5858.39,-3129.75 R81.1 ; -5884.36,-3111.8 -5884.36,-3107.93 U3.20
CH330_D+: J1.3 U17.1 | length 1480.7
  Top Layer w10: v1@-8747.16,-3155 -8732.16,-3170 -7583.25,-3170 -7478.25,-3065 v1(-7370.97,-3065)
  Bottom Layer w15: J1.3 v1@-8752.65,-3158.51
  other v1: -8748.7,-3156.54
CH330_D-: J1.2 U17.2 | length 1446
  Top Layer w10: v1(-8751.81,-3185) -8741.81,-3195 -7572.81,-3195 -7467.81,-3090 v1(-7405,-3090)
  Bottom Layer w15: J1.2 v1@-8755.89,-3184.11
LED0: U3.2 U14.2 | length 2750.3
  Top Layer w15: v3(-5178.15,-2796.38) -4291.32,-2796.38 -3665.91,-3421.79 -3145.06,-3421.79 U14.2
  Bottom Layer w10: U3.2@-5461.93,-2955.95 -5461.84,-2955.95 -5431.3,-2986.49 -5368.89,-2986.49 -5272.92,-2890.52 -5178.78,-2796.38 v3(-5178.15,-2796.38)
LED1: U3.3 U15.2 | length 3111.1
  Top Layer w15: v3(-5156.96,-2825) -4319.47,-2825 -3694.47,-3450 -2834.87,-3450 U15.2
  Bottom Layer w10: U3.3 -5475.76,-2969.86 -5441.92,-3003.7 -5349.83,-3003.7 -5171.13,-2825 v3(-5156.96,-2825)
LED2: U3.4 U16.2 | length 3472.1
  Top Layer w15: v3(-5142.03,-2854.05) -4340.95,-2854.05 -3715,-3480 -2526.47,-3480 U16.2
  Bottom Layer w10: U3.4 -5489.68,-2983.79 -5453.38,-3020.09 -5330.16,-3020.09 -5165.59,-2855.52 -5143.51,-2855.52 v3(-5142.03,-2854.05)
NetC17_1: C17.1 U17.8 | length 104.1
  Bottom Layer w10: U17.8@-7350.47,-2887.68 U17.8 ; C17.1@-7304.65,-2933.5 -7304.65,-2937.89 -7294.69,-2947.85 C17.1
  Bottom Layer w15: U17.8@-7350.47,-2887.68 C17.1@-7304.65,-2933.5
NetR1_1: R1.1 U21.1 | length 358.8
  Top Layer w10: U21.1@-4319.99,355.75 v3(-4085.74,590)
  Bottom Layer w10: -4085.74,599.29 R1.1@-4085.74,626.85
NetR3_1: R3.1 U1.1 | length 358.8
  Top Layer w10: U1.1@-3426.85,355.75 v3(-3192.6,590)
  Bottom Layer w10: -3192.6,599.29 R3.1
NetR5_1: R5.1 U2.1 | length 358.8
  Top Layer w10: U2.1@-2527.39,362.44 v3(-2293.14,596.69)
  Bottom Layer w10: -2293.14,605.98 R5.1
NetR7_1: R7.1 U4.1 | length 358.8
  Top Layer w10: U4.1@-6884.72,-701.85 v3(-6650.47,-467.6)
  Bottom Layer w10: -6650.47,-458.31 R7.1@-6650.47,-430.75
NetR9_1: R9.1 U5.1 | length 358.8
  Top Layer w10: U5.1@-5999.94,-703.41 v3(-5765.69,-469.16)
  Bottom Layer w10: -5765.69,-459.87 R9.1@-5765.69,-432.31
NetR11_1: R11.1 U6.1 | length 358.8
  Top Layer w10: -5100.52,-692.94 v3(-4866.27,-458.69)
  Bottom Layer w10: -4866.27,-449.4 R11.1
NetR13_1: R13.1 U7.1 | length 358.8
  Top Layer w10: U7.1@-4204.28,-692.94 v3(-3970.03,-458.69)
  Bottom Layer w10: -3970.03,-449.4 R13.1
NetR15_1: R15.1 U8.1 | length 375.6
  Top Layer w10: U8.1 U8.1@-8777.97,373.7 ; U8.1@-8774.99,355.75 v3(-8540.74,590)
  Bottom Layer w10: -8540.74,599.29 R15.1
NetR17_1: R17.1 U9.1 | length 358.8
  Top Layer w10: U9.1@-7881.61,355.75 v3(-7647.36,590)
  Bottom Layer w10: -7647.36,599.29 R17.1
NetR19_1: R19.1 U10.1 | length 358.8
  Top Layer w10: U10.1@-6994.46,355.75 v3(-6760.21,590)
  Bottom Layer w10: -6760.21,599.29 R19.1
NetR21_1: R21.1 U11.1 | length 358.8
  Top Layer w10: U11.1@-6102.35,355.75 v3(-5868.1,590)
  Bottom Layer w10: -5868.1,599.29 R21.1
NetR23_1: R23.1 U12.1 | length 358.8
  Top Layer w10: U12.1@-5207.98,355.75 v3(-4973.73,590)
  Bottom Layer w10: -4973.73,599.29 R23.1
NetR25_2: R25.2 U13.1 | length 184
  Top Layer w15: U13.1 v2(-3292.12,-3363.13)
  Bottom Layer w15: R25.2 -3343.71,-3467.08 -3336.25,-3459.62 -3336.25,-3458.83 -3292.12,-3414.7 v2(-3292.12,-3363.13)
NetR26_2: R26.2 U14.1 | length 171.9
  Top Layer w15: U14.1 v2(-2953.72,-3363.13)
  Bottom Layer w15: R26.2@-2997.85,-3458.83 -2953.72,-3414.7 v2(-2953.72,-3363.13)
NetR27_2: R27.2 U15.1 | length 171.9
  Top Layer w15: U15.1 v2(-2615.32,-3363.13)
  Bottom Layer w15: R27.2@-2659.45,-3458.83 -2615.32,-3414.7 v2(-2615.32,-3363.13)
NetR28_2: R28.2 U16.1 | length 171.9
  Top Layer w15: U16.1 v2(-2276.92,-3363.13)
  Bottom Layer w15: R28.2@-2321.05,-3458.83 -2276.92,-3414.7 v2(-2276.92,-3363.13)
NetR51_2: R51.2 R88.1 U18.4 | length 233.6
  Bottom Layer w15: U18.4 -8318.66,-3286.45 -8331.92,-3299.71 R88.1 -8331.92,-3301.29 -8275.29,-3357.92 R51.2
NRST: C108.1 U3.7 Y6.1 | length 1978.4
  Top Layer w15: v2(-5449.78,-3079.39) -5449.78,-3081.83 -5429.98,-3101.63 -5429.98,-3118.99 -5418.98,-3130 v3(-4105.98,-3130) ; v3(-3822.51,-3115.1) -3791.01,-3146.6 -3705.7,-3146.6 Y6.1
  Bottom Layer w10: U3.7 -5489.38,-3068.09 -5464.88,-3068.09 -5453.57,-3079.39 v2(-5449.78,-3079.39)
  Bottom Layer w15: v3(-4105.98,-3130) -4047.98,-3072 C108.1 v3(-3822.51,-3115.1)
OSCIN: C26.2 U3.5 Y1.12@-5039.86,-3021.33 | length 547
  Bottom Layer w10: U3.5 -5503.6,-2997.7 -5465.21,-3036.09 -5320.32,-3036.09 -5232.81,-2948.57 -5172.16,-2948.57 -5171.61,-2948.01 -5171.05,-2948.57 C26.2 C26.2@-5156.4,-2949.13
  Bottom Layer w15: C26.2@-5156.4,-2949.13 -5112.06,-2949.13 Y1.12@-5039.86,-3021.33
OSCOUT: C27.2 U3.6 Y1.12@-5290.41,-3271.88 | length 475.4
  Bottom Layer w10: U3.6 -5477.55,-3052.09 -5330.32,-3052.09 C27.2 C27.2@-5297.48,-3084.93 ; Y1.12@-5290.41,-3271.88 -5248.65,-3230.12 Y1.12@-5248.65,-3181.51
  Bottom Layer w15: C27.2@-5297.48,-3084.93 -5297.48,-3132.68 Y1.12@-5248.65,-3181.51
PA11: P1.4 U3.32 | length 818
  Top Layer w10: v2@-5758.47,-3499.46 -5737.19,-3478.18 -5737.19,-2995.28 -5674.87,-2932.96 v2(-5674.87,-2861.14)
  Bottom Layer w10: v2(-5759.59,-3499.89) v2@-5759.3,-3500.18 ; P1.4@-5759.3,-3547.7 P1.4 ; U3.32@-5718.45,-2782.47 -5674.87,-2826.05 v2(-5674.87,-2861.14)
  Bottom Layer w15: P1.4@-5759.3,-3547.7 v2@-5759.3,-3500.18
PA12: P1.3 U3.33 | length 871.9
  Top Layer w10: v2(-5704.74,-3498) -5704.74,-3002.23 -5642.12,-2939.62 v2(-5642.12,-2859.09)
  Bottom Layer w10: v2@-5704.74,-3500.13 v2(-5704.74,-3498) ; U3.33@-5704.54,-2768.55 -5642.12,-2830.96 ; P1.3@-5645.08,-3561.05 P1.3@-5645.08,-3559.78 ; v2@-5641.08,-2863.05 -5641.08,-2832
  Bottom Layer w15: v2@-5704.74,-3500.13 P1.3@-5645.08,-3559.78
PB3: C3.1 R1.2 R2.2 S1.2 U3.39 | length 4237.8
  Top Layer w10: v3(-5520,-2365.21) -5520,-2180 -4475,-1135 -4475,626.4 -4447.89,653.51 -4415.44,653.51 S1.2
  Bottom Layer w10: U3.39 -5573.69,-2741.46 -5520,-2687.77 v3(-5520,-2365.21)
  Bottom Layer w15: S1.2@-4381.07,686.69 R1.2@-4085.74,686.69
PB4: C4.1 R3.2 R4.2 S2.2 U3.40 | length 4578.8
  Top Layer w10: v3(-5441.21,-2365.21) -5440.42,-2365.21 -5140.26,-2065.04 -3590,-514.79 -3590,605.17 S2.2@-3520.68,674.49
  Bottom Layer w10: U3.40 -5504,-2699.74 -5504,-2427.99 v3(-5441.21,-2365.21) ; S2.2@-3495.42,686.69 S2.2@-3490.42,686.69 ; S2.2 S2.2@-3490.42,686.69 ; R3.2 R4.2 C4.1 S2.2@-3490.42,686.69
PB5: C5.1 R5.2 R6.2 S3.2 U3.41 | length 4936
  Top Layer w10: v3(-5346.57,-2363.02) -5345.1,-2361.54 -5345.1,-2321.06 -2695,329.04 -2695,616.49 S3.2@-2624.8,686.69
  Bottom Layer w10: U3.41 -5488,-2711.57 -5488,-2504.44 v3(-5346.57,-2363.02) ; S3.2@-2575,686.69 R5.2@-2305.03,686.69
PB6: C6.1 R7.2 R8.2 S4.2 U3.42 | length 3423.7
  Top Layer w15: S4.2@-6982.12,-386.12 -7045,-449.01 -7045,-995.7 v3(-5457.04,-2583.65) ; S4.2@-6952.15,-386.12 S4.2
  Bottom Layer w10: U3.42 -5471.32,-2722.73 -5471.32,-2599.48 -5457.04,-2585.2 v3(-5457.04,-2583.65)
  Bottom Layer w15: S4.2 -6928.03,-362 C6.1 R8.2 R7.2
PB7: C7.1 R9.2 R10.2 S5.2 U3.43 | length 4387.6
  Top Layer w10: v2(-5365,-50) -4915,-50 -4810,-155 v2(-4810,-722.97) ; v2(-5264.4,-2370.4) -5261.98,-2370.4 -4812.42,-1920.84 v2(-4810,-1920.84)
  Bottom Layer w10: R9.2 -5764.9,-362 -5452.9,-50 v2(-5365,-50) ; U3.43 -5518.01,-2797.14 -5449,-2728.13 -5449,-2674.94 -5448.36,-2674.3 -5448.36,-2619.34 -5428.5,-2599.48 -5428.5,-2490.08 -5308.82,-2370.4 v2(-5264.4,-2370.4) ; v2(-4810,-1920.84) v2(-4810,-722.97)
  Bottom Layer w15: S5.2 -6037.37,-362 C7.1 R10.2 R9.2
PB8: C8.1 R11.2 R12.2 S6.2 U3.45 | length 2998.5
  Top Layer w10: v3(-5428.5,-2762.93) -5428.5,-2543.16 -5541.91,-2429.75 -5541.91,-725.28 -5229.32,-412.68 -5197.41,-412.68 S6.2
  Bottom Layer w10: U3.45 -5490.17,-2824.85 -5428.5,-2763.18 v3(-5428.5,-2762.93)
  Bottom Layer w15: S6.2 -5146.72,-362 C8.1 R12.2 R11.2
PB9: C9.1 R13.2 R14.2 S7.2 U3.46 | length 4352.6
  Top Layer w10: v3(-5376.91,-2751.12) -5379,-2751.12 -5398.59,-2731.54 -5398.59,-2443.11 v3@-3319.28,-363.8
  Bottom Layer w10: U3.46 -5475.76,-2839.02 -5449.8,-2813.06 -5449.07,-2813.06 -5388.61,-2752.6 -5378.39,-2752.6 v3(-5376.91,-2751.12) ; -4062.33,-362 R14.2 R13.2 v3(-3321.08,-362)
  Bottom Layer w15: S7.2 -4256.06,-362 C9.1 -4062.33,-362
PB10: C10.1 R15.2 R16.2 S8.2 U3.21 | length 5250.5
  Top Layer w15: v3(-8445,627.89) -8445,175 -6841.27,-1428.73 -6841.27,-2062.37 -5864.83,-3038.81 -5851.21,-3038.81 v2(-5849.49,-3040.53)
  Bottom Layer w10: v2(-5849.49,-3040.53) -5846.81,-3037.85 -5842.12,-3037.85 U3.21@-5788.44,-2984.17
  Bottom Layer w15: S8.2@-8835,687.34 -8834.35,686.69 C10.1 R16.2 -8503.8,686.69 v3(-8445,627.89)
PB11: C11.1 R17.2 R18.2 S9.2 U3.22 | length 4813.1
  Top Layer w15: v2(-7531.72,570.92) -7531.72,-618.28 -6755,-1395 -6755,-2090 -5849.63,-2995.37 -5849.63,-3008.85 v2(-5847.91,-3010.58)
  Bottom Layer w10: v2(-5847.91,-3010.58) -5845.23,-3007.9 -5840.49,-3007.9 -5802.46,-2969.86 U3.22
  Bottom Layer w15: S9.2@-7953.69,686.69 S9.2@-7943.69,686.69 ; S9.2 S9.2@-7943.69,686.69 ; v2(-7531.72,570.92) -7531.72,571.85 -7646.57,686.69 R17.2 R18.2 C11.1 S9.2@-7943.69,686.69
PB12: C12.1 R19.2 R20.2 S10.2 U3.25 | length 4320.9
  Top Layer w10: v3(-6525,585) -6525,-608.92 v3(-6470,-663.92)
  Bottom Layer w10: S10.2@-7063.04,686.69 S10.2@-7053.04,686.69 ; S10.2 S10.2@-7053.04,686.69 ; v3(-6525,585) -6626.69,686.69 R19.2 R20.2 C12.1 S10.2@-7053.04,686.69 ; v3(-6470,-663.92) -6270.78,-863.13 -6065,-1068.92 -6065,-2631.67 U3.25
  other v1: -6595,668.95
PB13: C13.1 R21.2 R22.2 S11.2 U3.26 | length 4081.9
  Top Layer w10: v3(-6260,-680) -6260,615 -6226.93,648.07 -6226.93,652.97 -6192.56,687.34 S11.2
  Bottom Layer w10: v3(-6260,-680) -5919.83,-1020.17 -5919.83,-2748.99 U3.26
  Bottom Layer w15: S11.2@-6167.38,686.69 S11.2@-6162.38,686.69 ; S11.2 S11.2@-6162.38,686.69 ; R21.2 R22.2 C13.1 S11.2@-6162.38,686.69
PB14: C14.1 R23.2 R24.2 S12.2 U3.27 | length 4124.1
  Top Layer w10: v3(-5810,-670) -5414.11,-274.11 -5414.11,575.89 -5337.03,652.97 -5306.75,652.97 S12.2
  Bottom Layer w10: v3(-5810,-670) -5870.47,-730.47 -5870.47,-2770.52 U3.27
  Bottom Layer w15: S12.2@-5276.73,686.69 S12.2@-5271.73,686.69 ; S12.2 S12.2@-5271.73,686.69 ; R23.2 R24.2 C14.1 S12.2@-5271.73,686.69
SWCLK: P4.2 U3.37 | length 1319.8
  Top Layer w10: v2(-5575.02,-2861.14) -5575.02,-2940.52 -5648.93,-3014.43 -5648.93,-3465.2 -5558.39,-3555.74 v2@-5182.89,-3555.74
  Bottom Layer w10: U3.37 -5601.53,-2714.23 -5629.56,-2742.27 -5629.56,-2779.41 -5575.02,-2833.95 v2(-5575.02,-2861.14)
  other v2: -5181.08,-3557.55
SWIO: P4.3 U3.34 | length 1228.7
  Top Layer w10: v2(-5608.57,-2861.14) -5608.57,-2940.95 -5676.7,-3009.07 -5676.7,-3477.55 -5573.01,-3581.24 v2(-5276.08,-3581.24)
  Bottom Layer w10: U3.34@-5690.61,-2754.63 -5608.57,-2836.67 v2(-5608.57,-2861.14)
U1_RX: P2.2 U3.31 U17.6 | length 2677.4
  Top Layer w10: v2(-6044.6,-2729) v2@-6043.21,-2727.62 ; v2(-5957.17,-3498) -5758.71,-3299.55 -5758.71,-2962.94 v2(-5703.72,-2907.94) ; v2@-5803,-2727.62 v2(-5801.62,-2726.23)
  Top Layer w15: v2@-6043.21,-2727.62 v2@-5803,-2727.62
  Bottom Layer w10: U17.6 U17.6@-7450.47,-2847.68 ; v2@-6045.94,-2727.66 v2(-6044.6,-2729) ; P2.2 P2.2@-5951.04,-3539.04 ; v2(-5801.62,-2726.23) -5801.62,-2727.53 -5746.29,-2782.85 U3.31 ; U3.31@-5732.38,-2796.39 -5702.25,-2826.51 -5702.25,-2906.48 v2(-5703.72,-2907.94)
  Bottom Layer w15: U17.6@-7450.47,-2847.68 -7330.46,-2727.66 v2@-6045.94,-2727.66 ; v2(-5957.17,-3498) -5958.58,-3499.42 -5958.58,-3531.49 P2.2@-5951.04,-3539.04
U1_TX: P2.3 U3.30 U17.7 | length 2683.5
  Top Layer w10: v2(-6060,-3498) -5989.69,-3498 -5779.58,-3287.89 -5779.58,-2931.72 -5727.44,-2879.58 v2(-5725.25,-2879.58)
  Top Layer w15: v2(-5990.15,-2762.83) -5989.34,-2762.01 -5848.08,-2762.01 v2(-5847.27,-2761.2)
  Bottom Layer w10: U17.7 U17.7@-7400.47,-2847.68 ; v2(-5847.27,-2761.2) -5844.59,-2758.52 -5807.76,-2758.52 -5807.5,-2758.25 -5799.21,-2758.25 U3.30 -5760.21,-2797.75 -5725.25,-2832.7 v2(-5725.25,-2879.58)
  Bottom Layer w15: U17.7@-7400.47,-2847.68 -7313.17,-2760.38 -6656.3,-2760.38 -6653.85,-2762.83 v2(-5990.15,-2762.83) ; v2(-6060,-3498) -6060,-3527.08 -6039.08,-3548 P2.3@-6039.08,-3561.05
VCC_3.3V: C2.2 C18.2 C19.2 C21.1 C24.1 C30.2 C46.2 C47.2 C48.2 C49.2 C66.1 C67.1 C68.1 C69.1 C70.1 C71.1 C72.1 C73.1 C102.1 C103.1 C104.1 P1.2 P2.4 P4.4 R25.1 R26.1 R27.1 R28.1 R29.1 R29.4 R29.8 R29.9 R31.1 R31.4 R31.8 R31.9 R33.1 R40.2 R51.1 R81.2 S1.3 S2.3 S3.3 S4.3 S5.3 S6.3 S7.3 S8.3 S9.3 S10.3 S11.3 S12.3 U3.9 U3.24 U3.36 U3.48 U18.2 | length 15384.5
  Top Layer w15: v2(-5484.25,-3125.35) -5485.97,-3123.63 -5485.97,-3091.36 -5493.98,-3083.35 -5493.98,-3034.65 v4(-5377.69,-2918.36)
  Top Layer w50: v4(-5882.94,-2872.86) v4@-5683.74,-2673.65
  Bottom Layer w10: U3.36@-5678.25,-2713.74 v4(-5678.25,-2668.17) ; U3.9 -5487.79,-3125.35 v2(-5484.25,-3125.35)
  Bottom Layer w15: -6160,-3175 -6157.81,-3177.19 ; C71.1 U3.24@-5829.81,-2938.28 ; v2(-5484.25,-3125.35) -5482.97,-3125.35 -5461.72,-3146.6 C103.1 ; U3.48@-5448.41,-2868.97 -5343.94,-2868.97 ; C18.2@-5355.39,-3468.81 C18.2 C18.2@-5355.2,-3469.8 ; P4.4@-5355.2,-3547.8 P4.4
  Bottom Layer w30: -6159.99,-3175 -5904.57,-3175 -5901.26,-3171.69 -5901.2,-3171.69 R81.2 -5812.9,-3260 -5486.01,-3260 C69.1@-5419.12,-3193.11 ; -6157.81,-3177.19 C19.2 -6157.85,-3467.34 -6157.85,-3545.85 P2.4 -6088,-3620 -5635.34,-3620 ; C30.2 -5557.85,-3471.94 -5557.85,-3546.85 P1.2 -5563.34,-3548 -5635.34,-3620 ; C103.1@-5460.43,-3152.71 -5441.21,-3171.93 -5430.48,-3182.67 -5429.57,-3182.67 C69.1@-5419.12,-3193.11 ; C69.1 C69.1@-5419.12,-3193.11 ; P4.4@-5355.2,-3547.8 C18.2@-5355.2,-3469.8 ; P4.4 -5359.34,-3548 -5431.34,-3620 -5635.34,-3620
  Bottom Layer w50: R51.1 -8150.8,-3298.08 -8095.16,-3242.43 C46.2@-8095.16,-3215.42 ; C47.2 -6209.95,-3199.86 C68.1 C102.1 C71.1 v4(-5882.94,-2872.86) ; R31.8@-7699.73,-708.44 -7681.48,-690.19 C24.1 -7653.43,-560.03 -7653.43,-555.56 -7627.87,-530 ; -7020.31,-530 -7627.87,-530 ; R31.4 -7034.59,-1615 -7106,-1686.41 -7106,-1897.92 -7034.59,-1969.33 R31.1 -6995,-2189.53 -7425.48,-2620 -8663.23,-2620 -8944.21,-2339.02 -8944.21,-2299.44 -8953.45,-2290.2 R31.9 -9129.8,-2290.2 -9190,-2230 -9190,-929.96 -8790.04,-530 -7627.87,-530 ; S4.3@-6958.72,-541.11 S4.3 ; C66.1 C104.1 C72.1 -5669.92,-2620.94 -5669.92,-2659.84 v4(-5678.25,-2668.17) ; R40.2 -5353.83,-2617.22 -5352.21,-2617.22 -5345.9,-2610.92 -5304.48,-2610.92 -5206.82,-2708.58 -5206.82,-2755.09 C67.1 ; R29.8 R29.8@-2957.97,-668.92 ; R29.8@-2936.48,-701.48 C21.1 -2908.43,-550.03 -2908.43,-545.56 -2872.87,-510 -2525,-510 -2380,-655 -2380,-1533.25 -2304.78,-1608.47 -2299.37,-1608.47 R29.4@-2292.83,-1615 ; R29.1 -2292.84,-1969.33 -2380,-1882.17 -2380,-1702.17 R29.4@-2292.83,-1615 ; R29.4 R29.4@-2292.83,-1615
pads on no net: "R31. " J1.4 J1.6 J1.7 J1.$$$1 J1.$$$2 R29. R33.4 R33.5 S1.1 S2.1 S3.1 S4.1 S5.1 S6.1 S7.1 S8.1 S9.1 S10.1 S11.1 S12.1 U3.1 U3.19 U3.28 U3.29 U3.38 U17.4

## Polygon pours and split planes (outlines as drawn)
AGND on Bottom Layer "AGND_L02_P083" (solid, remove dead copper, pour order 83): -9260,1105 -1960.81,1105 -1960,1104.19 -1960,-3674.19 -9260,-3674.19
VCC_3.3V on Bottom Layer "VCC_3.3V_L02_P081" (solid, remove dead copper, pour order 81): -5778.96,-2260 -3753.25,-2260 -3753.25,-2340 -5778.96,-2340
VCC_3.3V on Bottom Layer "VCC_3.3V_L02_P079" (solid, remove dead copper, pour order 79): -5244.83,-2736.92 -5197.91,-2783.84 -5371.02,-2956.95 -5417.94,-2910.03
VCC_3.3V on Bottom Layer "VCC_3.3V_L02_P078" (solid, remove dead copper, pour order 78): -5775.06,-2562.94 -5782.85,-1305.57 -5595,-1305.57 -5601.53,-2562.94
VCC_3.3V on Bottom Layer "VCC_3.3V_L02_P076" (solid, remove dead copper, pour order 76): -4465,-3555.12 -4465,-2260 -4130,-2260 -4130,-3555.12
VCC_3.3V on Bottom Layer "VCC_3.3V_L02_P075" (solid, remove dead copper, pour order 75): -4265.88,-3504.12 -2301.94,-3504.12 -2301.94,-3554.48 -4265.88,-3554.48
VCC_3.3V on Bottom Layer "VCC_3.3V_L02_P074" (solid, remove dead copper, pour order 74): -5460,-1740 -5787.44,-1740 -5787.44,-500 -5460,-500
VCC_3.3V on Bottom Layer "VCC_3.3V_L02_P073" (solid, remove dead copper, pour order 73): -9220,-1955 -9220,555 -8800,555 -8800,-1955
VCC_3.3V on Bottom Layer "VCC_3.3V_L02_P072" (solid, remove dead copper, pour order 72): -8985,555 -7745,555 -7745,-830 -8985,-830
VCC_3.3V on Bottom Layer "VCC_3.3V_L02_P071" (solid, remove dead copper, pour order 71): -7086.08,-500 -2905,-500 -2905,-628.32 -7086.08,-628.32
VCC_3.3V on Bottom Layer "VCC_3.3V_L02_P070" (solid, remove dead copper, pour order 70): -8965,545 -2470,545 -2470,437.34 -8965,437.34
VCC_3.3V on Bottom Layer "VCC_3.3V_L02_P069" (solid, remove dead copper, pour order 69): -7688.97,-3175 -8125,-3175 -8125,-3249.47 -8122.24,-3252.23 -7688.97,-3252.23
VCC_3.3V on Bottom Layer "VCC_3.3V_L02_P068" (solid, remove dead copper, pour order 68): -8232.38,-3165.12 -8200,-3165.12 -8200,-3315.36 -8232.38,-3315.36
+5V on Bottom Layer "+5V_L02_P066" (solid, remove dead copper, pour order 66): -8815,-3208.79 -8350,-3208.79 -8350,-3252.23 -8815,-3252.23
AGND on Top Layer "AGND_L01_P085" (solid, remove dead copper, pour order 85): -9260,1105 -1960.81,1105 -1960,1104.19 -1960,-3674.19 -9260,-3674.19

## Silkscreen, mask and mechanical layers (free items; w line width, h text height)
Top Overlay:
  text "灯光" at -4550,135 h230
  text "定深" at -3655,135 h230
  text "机械臂" at -2875.46,135 h230
  text "1" at -8860,125 h150
  text "2" at -7985,125 h150
  text "3" at -7086.08,125 h150
  text "4" at -6195.42,125 h150
  text "5" at -5305.08,125 h150
  text "6" at -6982.12,-927.19 h150
  text "7" at -6083.3,-927.19 h150
  text "8" at -5205.47,-927.19 h150
  text "9" at -4299.6,-927.19 h150
  text "D0" at -3085,-3548.89 h100
  text "PWR" at -3485,-3550 h100
  text "D1" at -2750,-3550 h100
  text "D2" at -2405,-3550 h100
  text "3.3" at -5386.18,-3563.89 h60
  text "IO" at -5272.92,-3565.92 h60
  text "CLK" at -5204.36,-3567.11 h60
  text "G" at -5070.79,-3567.11 h60
  text "G" at -5880.65,-3568.19 h60
  text "3.3" at -5586.92,-3568.19 h60
  text "G" at -5485,-3568.19 h60
  text "3.3" at -6196.28,-3568.94 h60
  text "TX" at -6096.28,-3568.94 h60
  text "RX" at -5995,-3570.59 h60
  text "A11" at -5809,-3570 h60
  text "A12" at -5706.89,-3570.59 h60
Mechanical 1:
  lines w5.91: -2112.23,-3672.43 ccw(c-2112.23,-3532.13) -1971.92,-3532.13 -1971.61,967.87 ; -2110.81,-3672.42 -9110.81,-3674.19 cw(c-9110.81,-3535) -9250,-3535 -9250,965 cw(c-9110.81,965) -9110.81,1104.19 -2110.81,1104.19 cw(c-2110.81,966.17) -1972.78,966.17